# EAGLE board sang (EAGLE 6.2)
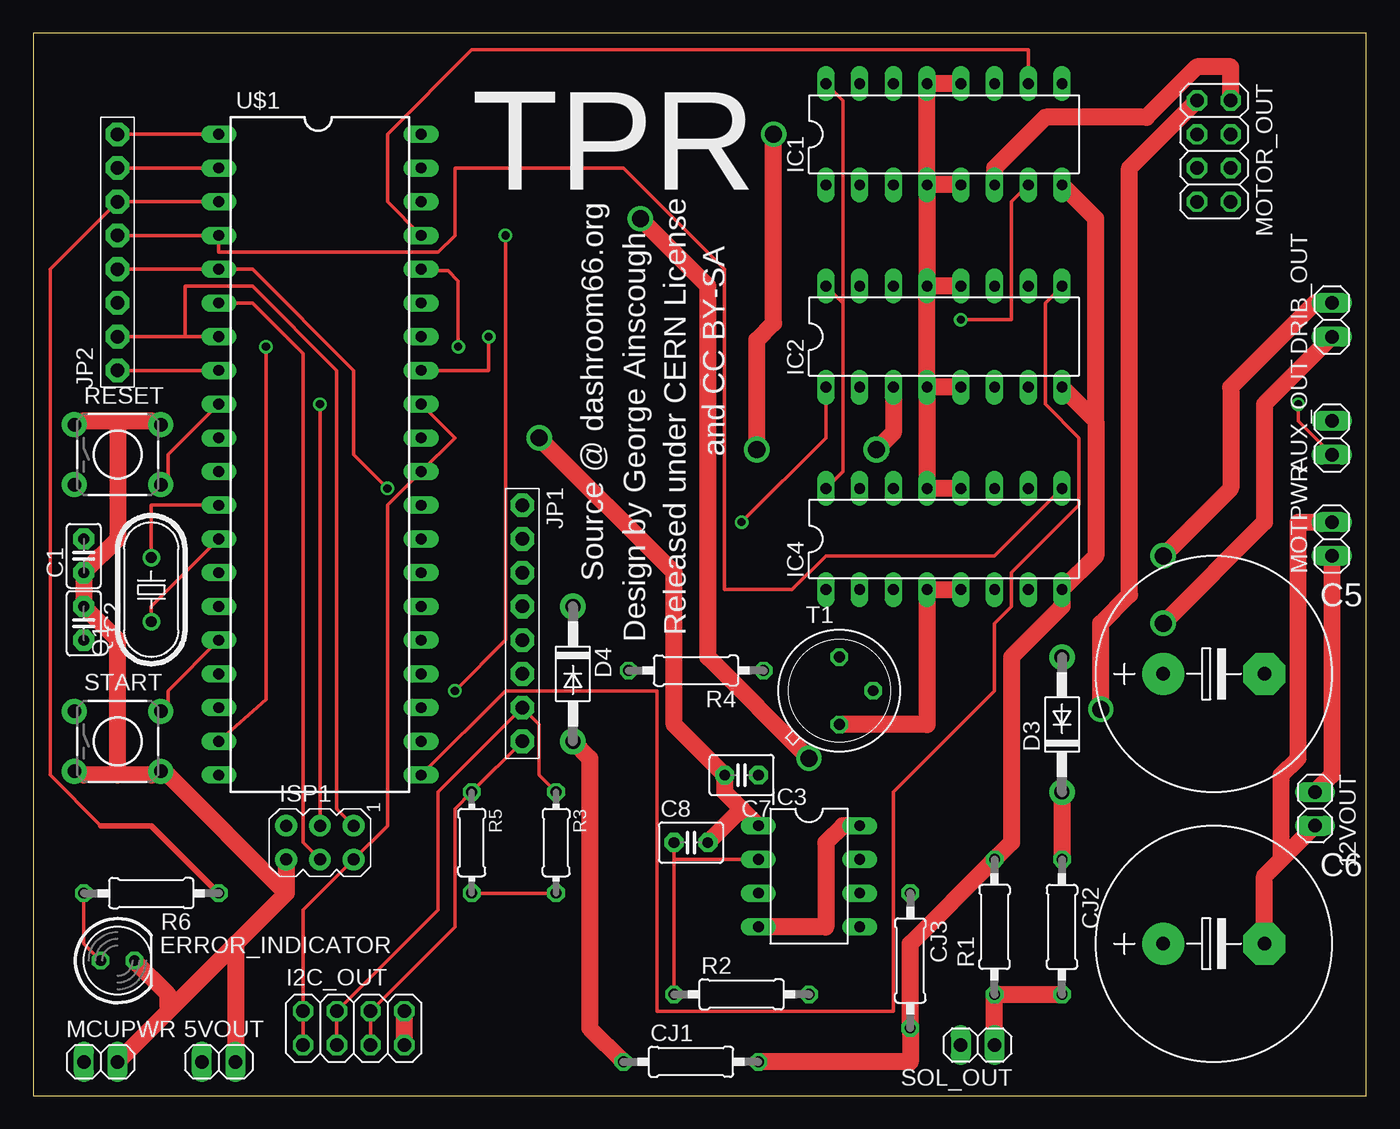
[diagram p0: board, top side]
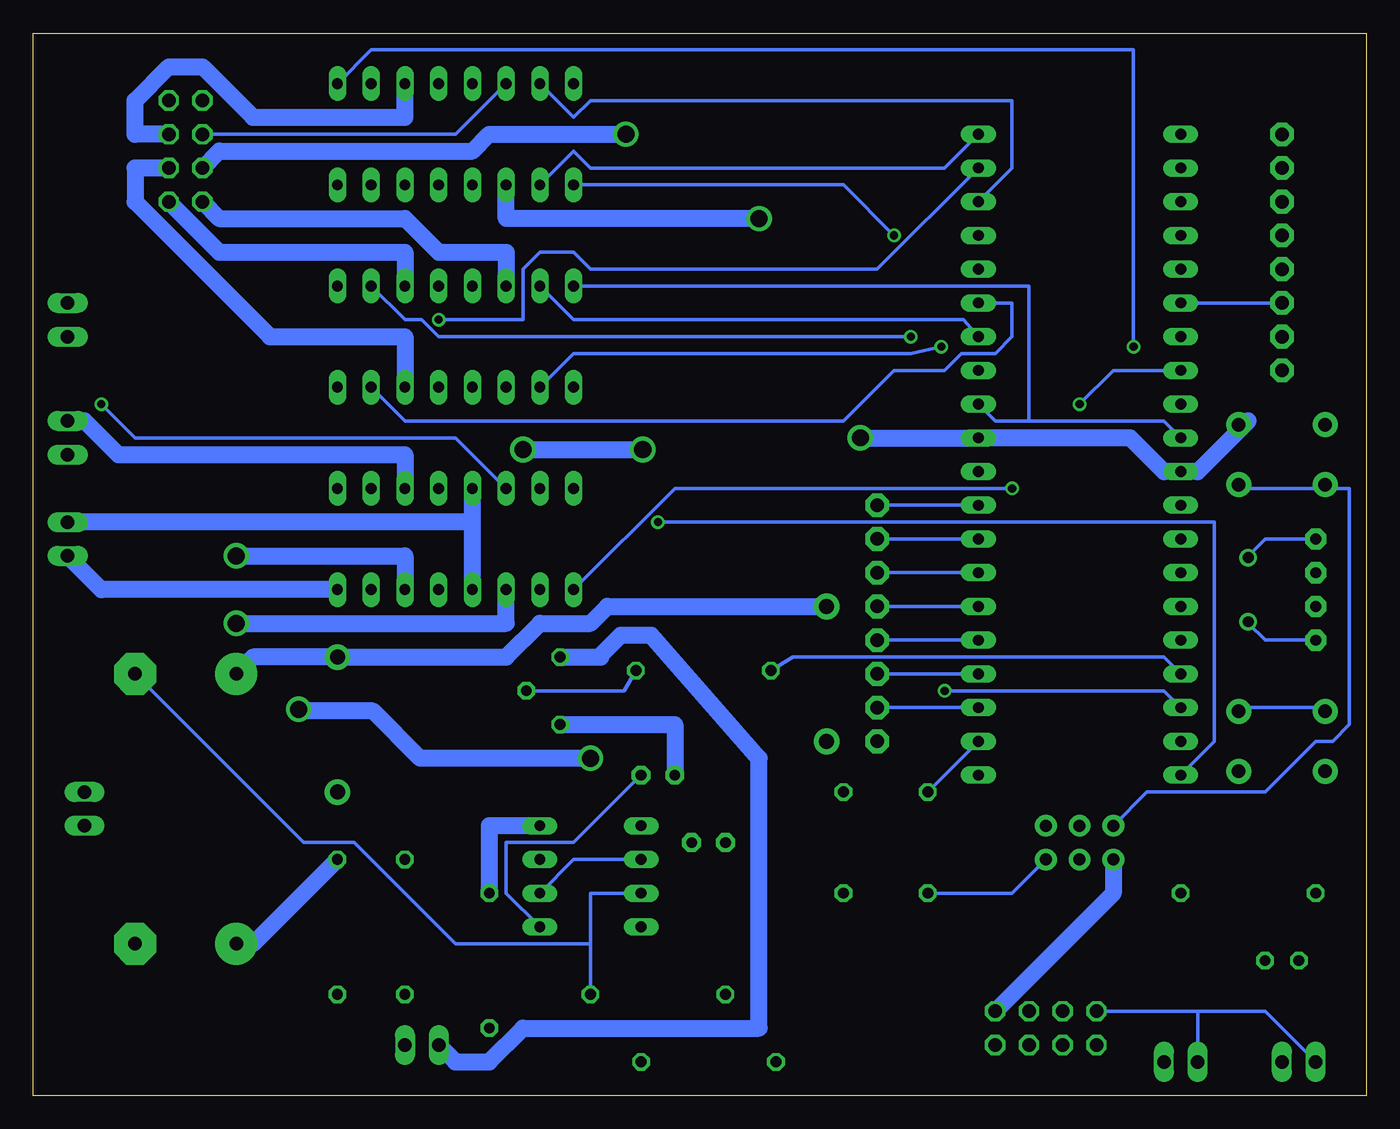
[diagram p1: board, bottom side, seen from below]

Size 100.38 x 80 mm. Coordinates in mm from the lower left corner, seen from the top.
Outline: 0,0 100.38,0 100.38,80 0,80 0,0
Copper layers (1*16): Top 0.035mm / dielectric 1.5mm / Bottom 0.035mm
Design rules: minimum track width 10mil, minimum drill 24mil, track to track 8mil, track to pad 8mil, pad to pad 8mil, via to via 8mil, smd to smd 8mil, copper to edge 40mil, drill to drill 8mil, minimum pad ring 10mil, minimum via ring 8mil, stop-mask expansion 4mil, vias tented up to drill 0mil, thermal gap 10mil
Net classes: 0 default: width 0.254 mm, drill 0.254 mm; 1 HighPow: width 1.27 mm, drill 1.27 mm; 2 LowPow: width 0.254 mm, drill 0.254 mm

## Footprints (pad centres in the part's own frame; a part is rotated, then mirrored left to right if it is on the bottom)
1X02 = drill 1.016 long: 1 -1.27,0; 2 1.27,0
C2.5-2 = drill 0.813 pad 1.6 octagon: 1 -1.27,0; 2 1.27,0
E7,5-18 = drill 1.016 pad 3.15: + -3.81,0 | drill 1.016 pad 3.15 octagon: - 3.81,0
C025-030X050 = drill 0.813 pad 1.422 octagon: 1 -1.27,0; 2 1.27,0
0207/10 = drill 0.813 octagon: 1 -5.08,0; 2 5.08,0
DO41-10 = drill 1.118 pad 1.93: A 5.08,0; C -5.08,0
LED5MM = drill 0.813 octagon: A -1.27,0; K 1.27,0
2X04 = drill 1.016 octagon: 1 -3.81,-1.27; 2 -3.81,1.27; 3 -1.27,-1.27; 4 -1.27,1.27; 5 1.27,-1.27; 6 1.27,1.27; 7 3.81,-1.27; 8 3.81,1.27
DIL16 = drill 0.813 long: 1 -8.89,-3.81; 2 -6.35,-3.81; 3 -3.81,-3.81; 4 -1.27,-3.81; 5 1.27,-3.81; 6 3.81,-3.81; 7 6.35,-3.81; 8 8.89,-3.81; 9 8.89,3.81; 10 6.35,3.81; 11 3.81,3.81; 12 1.27,3.81; 13 -1.27,3.81; 14 -3.81,3.81; 15 -6.35,3.81; 16 -8.89,3.81
DIL-08 = drill 0.813 long: 1 -3.81,-3.81; 2 -1.27,-3.81; 3 1.27,-3.81; 4 3.81,-3.81; 5 3.81,3.81; 6 1.27,3.81; 7 -1.27,3.81; 8 -3.81,3.81
AVRISP = drill 0.9 pad 1.626: 1 -1.27,2.54; 2 1.27,2.54; 3 -1.27,0; 4 1.27,0; 5 -1.27,-2.54; 6 1.27,-2.54
1X08-BIG = drill 1.016 pad 1.778 octagon: 1 -8.89,0; 2 -6.35,0; 3 -3.81,0; 4 -1.27,0; 5 1.27,0; 6 3.81,0; 7 6.35,0; 8 8.89,0
HC49U70 = drill 0.813: 1 -2.413,0; 2 2.413,0
0204/7 = drill 0.813 octagon: 1 -3.81,0; 2 3.81,0
TACTILE-PTH = drill 1.016 pad 1.88: 1 -3.251,2.261; 2 3.251,2.261; 3 -3.251,-2.261; 4 3.251,-2.261
TO39 = drill 0.813 octagon: 1 0,-2.54; 2 2.54,0; 3 0,2.54
ATMEGA644 = drill 0.813 long: 1 -22.86,-7.62; 2 -20.32,-7.62; 3 -17.78,-7.62; 4 -15.24,-7.62; 5 -12.7,-7.62; 6 -10.16,-7.62; 7 -7.62,-7.62; 8 -5.08,-7.62; 9 -2.54,-7.62; 10 0,-7.62; 11 2.54,-7.62; 12 5.08,-7.62; 13 7.62,-7.62; 14 10.16,-7.62; 15 12.7,-7.62; 16 15.24,-7.62; 17 17.78,-7.62; 18 20.32,-7.62; 19 22.86,-7.62; 20 25.4,-7.62; 21 25.4,7.62; 22 22.86,7.62; 23 20.32,7.62; 24 17.78,7.62; 25 15.24,7.62; 26 12.7,7.62; 27 10.16,7.62; 28 7.62,7.62; 29 5.08,7.62; 30 2.54,7.62; 31 0,7.62; 32 -2.54,7.62; 33 -5.08,7.62; 34 -7.62,7.62; 35 -10.16,7.62; 36 -12.7,7.62; 37 -15.24,7.62; 38 -17.78,7.62; 39 -20.32,7.62; 40 -22.86,7.62

## Placement (x,y rotation side)
5VOUT  [1X02]  13.97,2.54 0 top
12VOUT  [1X02]  96.52,21.59 270 top
AUX_OUT  [1X02]  97.79,49.53 90 top
C1  22pF  [C2.5-2]  3.81,40.64 90 top
C2  22pF  [C2.5-2]  3.81,35.56 270 top
C5  [E7,5-18]  88.9,31.75 0 top
C6  [E7,5-18]  88.9,11.43 0 top
C7  100nF  [C025-030X050]  53.34,24.13 180 top
C8  1nF  [C025-030X050]  49.53,19.05 0 top
CJ1  [0207/10]  49.53,2.54 0 top
CJ2  [0207/10]  77.47,12.7 270 top
CJ3  [0207/10]  66.04,10.16 270 top
D3  1N4004  [DO41-10]  77.47,27.94 90 top
D4  1N4004  [DO41-10]  40.64,31.75 270 top
DRIB_OUT  [1X02]  97.79,58.42 90 top
ERROR_INDICATOR  [LED5MM]  6.35,10.16 0 top
I2C_OUT  [2X04]  24.13,5.08 0 top
IC1  L293D  [DIL16]  68.58,72.39 0 top
IC2  L293D  [DIL16]  68.58,57.15 0 top
IC3  NE555  [DIL-08]  58.42,16.51 270 top
IC4  L293D  [DIL16]  68.58,41.91 0 top
ISP1  AVRISP-6  [AVRISP]  21.59,19.05 270 top
JP1  [1X08-BIG]  36.83,35.56 270 top
JP2  [1X08-BIG]  6.35,63.5 90 top
MCUPWR  [1X02]  5.08,2.54 0 top
MOTOR_OUT  [2X04]  88.9,71.12 270 top
MOTPWR  [1X02]  97.79,41.91 90 top
Q1  16MHz  [HC49U70]  8.89,38.1 90 top
R1  10K  [0207/10]  72.39,12.7 90 top
R2  33K  [0207/10]  53.34,7.62 0 top
R3  [0204/7]  39.37,19.05 270 top
R4  10K  [0207/10]  49.91,32 180 top
R5  [0204/7]  33.02,19.05 270 top
R6  220  [0207/10]  8.89,15.24 180 top
RESET  [TACTILE-PTH]  6.35,48.26 0 top
SOL_OUT  [1X02]  71.12,3.81 180 top
START  [TACTILE-PTH]  6.35,26.67 0 top
T1  [TO39]  60.71,30.48 0 top
U$1  ATMEGA644*  [ATMEGA644]  21.59,49.53 270 top

## Library data of the parts
5VOUT 12VOUT AUX_OUT DRIB_OUT I2C_OUT MCUPWR MOTOR_OUT MOTPWR SOL_OUT = pinhead
C1 C2 = capacitor-wima
C5-C8 D3 D4 ISP1 JP1 JP2 = adafruit
CJ1-CJ3 R2 = rcl
ERROR_INDICATOR = led
IC1 IC2 IC4 = st-microelectronics; MPN: L293D; OC_FARNELL: 9589619; OC_NEWARK: 56P8249
IC3 = st-microelectronics; MF: Arrow Electronics; MPN: NE555N; OC_FARNELL: 1467742; OC_NEWARK: 89K1486
Q1 = crystal; OC_FARNELL: unknown; OC_NEWARK: unknown
R1 R3-R6 = resistor
RESET START = SparkFun
T1 = transistor
U$1 = ATMega644

## Nets
+5V [LowPow]: 5VOUT.1 I2C_OUT.1 I2C_OUT.2 IC1.16 IC2.16 IC4.16 ISP1.2 MCUPWR.1 R3.2 R5.2 U$1.10 U$1.30 U$1.32
+12V [HighPow]: 12VOUT.1 CJ1.2 CJ3.2 IC1.8 IC2.8 IC4.8 MOTPWR.1 R1.2
+24V [HighPow]: CJ2.2 R1.1 SOL_OUT.1
ERROR_LED: JP2.6 R6.1 U$1.3
GND [HighPow]: 5VOUT.2 12VOUT.2 C1.1 C2.1 C6.- C7.2 C8.2 ERROR_INDICATOR.K I2C_OUT.7 I2C_OUT.8 IC1.4 IC1.5 IC1.12 IC1.13 IC2.4 IC2.5 IC2.12 IC2.13 IC3.1 IC4.4 IC4.5 IC4.12 IC4.13 ISP1.6 MCUPWR.2 MOTPWR.2 RESET.1 RESET.2 START.3 START.4 T1.1 U$1.11 U$1.31
GO: START.1 START.2 U$1.16
M1+ [HighPow]: IC1.3 MOTOR_OUT.1
M1- [HighPow]: IC1.6 MOTOR_OUT.2
M1F: IC1.2 U$1.40
M1PWM: IC1.1 U$1.18
M1R: IC1.7 U$1.39
M2+: IC1.14 MOTOR_OUT.3
M2- [HighPow]: IC1.11 MOTOR_OUT.4
M2F: IC1.15 U$1.38
M2PWM: IC1.9 U$1.19
M2R: IC1.10 U$1.37
M3+ [HighPow]: IC2.3 MOTOR_OUT.5
M3- [HighPow]: IC2.6 MOTOR_OUT.6
M3F: IC2.2 U$1.36
M3PWM: IC2.1 U$1.20
M3R: IC2.7 U$1.35
M4+ [HighPow]: IC2.14 MOTOR_OUT.7
M4- [HighPow]: IC2.11 MOTOR_OUT.8
M4F: IC2.15 U$1.34
M4PWM: IC2.9 U$1.21
M4R: IC2.10 U$1.33
M5+ [HighPow]: DRIB_OUT.1 IC4.3
M5- [HighPow]: DRIB_OUT.2 IC4.6
M5F: IC4.2
M5PWM: IC4.1 JP2.4 U$1.5
M5R: IC4.7
M6+: AUX_OUT.1 IC4.14
M6- [HighPow]: AUX_OUT.2 IC4.11
M6F: IC4.15
M6PWM: IC4.9 JP2.5 U$1.4
M6R: IC4.10
MISO [LowPow]: ISP1.1 JP2.2 U$1.7
MOSI [LowPow]: ISP1.4 JP2.3 U$1.6
N$1: C1.2 Q1.2 U$1.12
N$2: C2.2 Q1.1 U$1.13
N$3: C8.1 IC3.2 IC3.6 R2.1
N$4: R4.1 T1.2
N$5: C5.- IC3.3 R2.2
N$6 [HighPow]: C5.+ D3.A D4.C
N$7 [HighPow]: SOL_OUT.2 T1.3
N$8: JP1.6 U$1.24
N$9: C7.1 IC3.5
N$10: JP1.5 U$1.25
N$11: JP1.4 U$1.26
N$12: JP1.3 U$1.27
N$13: JP1.2 U$1.28
N$14: JP1.1 U$1.29
N$15: JP2.8 U$1.1
N$16: JP2.7 U$1.2
N$18 [HighPow]: C6.+ CJ2.1 D3.C
N$19 [HighPow]: CJ1.1 D4.A
N$20 [HighPow]: CJ3.1 IC3.4 IC3.8
N$21: ERROR_INDICATOR.A R6.2
RST [LowPow]: ISP1.5 RESET.3 RESET.4 U$1.9
SCK [LowPow]: ISP1.3 JP2.1 U$1.8
SCL: I2C_OUT.5 I2C_OUT.6 JP1.8 R5.1 U$1.22
SDA: I2C_OUT.3 I2C_OUT.4 JP1.7 R3.1 U$1.23
SOLSIG: R4.2 U$1.17

## Tracks (layer width: path | path; a pad name or v marks a point on that pad's centre or on a via)
+5V
  Top 0.254: R3.2 R5.2 | I2C_OUT.1 I2C_OUT.2 20.32,13.97 ISP1.2 26.67,20.32 26.67,44.45 U$1.30 31.75,49.53 U$1.32 | IC4.16 60.96,46.99 60.96,59.69 | IC2.16 60.96,59.69 | IC1.16 60.96,74.93 60.96,59.69
  Bottom 0.254: ISP1.2 26.67,15.24 R5.2 | MCUPWR.1 7.62,6.35 12.7,6.35 | I2C_OUT.2 12.7,6.35 | 12.7,6.35 5VOUT.1 | U$1.10 15.24,50.8 25.4,50.8 | 25.4,50.8 27.94,50.8 U$1.32 | 25.4,50.8 25.4,60.96 IC2.16
+12V
  Top 1.27: CJ1.2 66.04,2.54 CJ3.2 66.04,11.43 R1.2 73.66,19.05 73.66,33.02 77.47,36.83 IC4.8 80.01,40.64 80.01,50.8 | 12VOUT.1 97.79,24.13 MOTPWR.1 | IC2.8 80.01,50.8 | IC1.8 80.01,66.04 80.01,50.8
  Bottom 1.27: MOTPWR.1 95.25,38.1 IC4.8
+24V
  Top 1.27: SOL_OUT.1 R1.1 CJ2.2
ERROR_LED
  Top 0.254: U$1.3 JP2.6 1.27,62.23 1.27,24.13 5.08,20.32
  Top 0.406: 5.08,20.32 8.89,20.32 R6.1
GND  (via drill 1.27)
  Top 1.27: 6.35,50.8 8.89,50.8 RESET.2 | 6.35,50.8 3.81,50.8 RESET.1 | 6.35,50.8 6.35,41.91 C1.1 C2.1 6.35,34.29 6.35,24.13 | 6.35,24.13 8.89,24.13 START.4 10.16,24.13 19.05,15.24 | 6.35,24.13 3.81,24.13 START.3 | I2C_OUT.8 I2C_OUT.7 | 19.05,15.24 15.24,11.43 | 15.24,11.43 10.16,6.35 | 10.16,6.35 MCUPWR.2 | ISP1.6 19.05,15.24 | 15.24,11.43 5VOUT.2 | 93.98,17.78 92.71,16.51 C6.- | 93.98,17.78 12VOUT.2 | MOTPWR.2 95.25,43.18 95.25,25.4 93.98,24.13 93.98,17.78 | IC1.12 IC1.13 IC1.4 | IC2.12 IC2.13 | IC1.5 IC1.4 | IC1.4 IC2.13 | IC4.12 IC4.13 IC2.4 | IC2.5 IC2.4 | 53.34,21.59 52.07,22.86 C7.2 48.26,27.94 48.26,39.37 v38.1,49.53 | 53.34,21.59 IC3.1 | 53.34,21.59 C8.2 | T1.1 67.31,27.94 IC4.4 IC4.5 | IC2.4 IC2.13 | ERROR_INDICATOR.K 10.16,7.62 10.16,6.35
  Bottom 1.27: RESET.2 8.89,50.8 12.7,46.99 U$1.11 15.24,46.99 17.78,49.53 U$1.31 v38.1,49.53 | I2C_OUT.8 19.05,15.24 ISP1.6 | C7.2 52.07,27.94 T1.1 | IC4.4 67.31,43.18 | 67.31,43.18 IC4.13 | 67.31,43.18 MOTPWR.2
GO
  Top 0.254: U$1.16 10.16,30.48 10.16,29.21 START.2
  Bottom 0.254: START.1 3.81,29.21 8.89,29.21 START.2
M1+  (via drill 1.27)
  Top 1.27: v45.72,66.04 50.8,60.96 50.8,33.02 v58.42,25.4 | MOTOR_OUT.1 82.55,69.85 82.55,37.72 80.39,35.56 v80.39,29.08
  Bottom 1.27: IC1.3 64.77,66.04 v45.72,66.04 | v58.42,25.4 71.25,25.4 74.8,28.96 80.26,28.96 v80.39,29.08
M1-
  Top 1.27: IC1.6 72.39,69.85 76.2,73.66 83.82,73.66 87.63,77.47 90.17,77.47 MOTOR_OUT.2
M1F
  Bottom 0.254: U$1.40 31.75,69.85 58.42,69.85 59.69,71.12 IC1.2
M1PWM  (via drill 0.61)
  Top 0.254: v31.75,30.48 35.56,34.29 v35.56,64.77
  Bottom 0.254: U$1.18 15.24,30.48 v31.75,30.48 | v35.56,64.77 39.37,68.58 IC1.1
M1R  (via drill 0.61)
  Top 0.254: v69.85,58.42 73.66,58.42 73.66,67.31 IC1.7
  Bottom 0.254: U$1.39 36.83,62.23 58.42,62.23 59.69,63.5 62.23,63.5 63.5,62.23 63.5,58.42 v69.85,58.42
M2+
  Bottom 0.254: IC1.14 68.58,72.39 MOTOR_OUT.3
M2-
  Bottom 1.27: IC1.11 72.39,73.66 83.82,73.66 87.63,77.47 90.17,77.47 92.71,74.93 92.71,72.39 MOTOR_OUT.4
M2F
  Bottom 0.254: U$1.38 26.67,69.85 26.67,74.93 58.42,74.93 59.69,73.66 IC1.15
M2PWM  (via drill 0.61)
  Top 0.254: U$1.19 17.53,29.84 v17.53,56.39
  Bottom 0.254: v17.53,56.39 17.53,78.74 74.93,78.74 IC1.9
M2R
  Top 0.254: U$1.37 26.67,67.31 26.67,72.39 33.02,78.74 74.93,78.74 IC1.10
M3+  (via drill 1.27, 1.3)
  Top 1.27: v55.75,72.39 55.75,58.17 54.48,56.9 v54.48,48.64 | IC2.3 64.77,49.91 v63.5,48.64
  Bottom 1.27: v55.75,72.39 66.04,72.39 67.31,71.12 86.36,71.12 MOTOR_OUT.5 | v63.5,48.64 v54.48,48.64
M3-
  Bottom 1.27: IC2.6 72.39,57.15 82.55,57.15 92.71,67.31 92.71,69.85 MOTOR_OUT.6
M3F  (via drill 0.61)
  Top 0.254: v32,56.39 32,61.34 31.24,62.1 29.34,62.1 U$1.36
  Bottom 0.254: v32,56.39 34.29,55.88 59.69,55.88 IC2.2
M3PWM  (via drill 0.61)
  Top 0.254: v53.34,43.18 59.69,49.53 IC2.1
  Bottom 0.254: U$1.20 11.43,26.67 11.43,43.18 v53.34,43.18
M3R
  Bottom 0.254: IC2.7 72.39,50.8 39.37,50.8 35.56,54.61 31.75,54.61 30.48,55.88 27.94,55.88 26.67,57.15 26.67,59.69 U$1.35
M4+
  Bottom 1.27: IC2.14 64.77,63.5 69.85,63.5 72.39,66.04 86.36,66.04 MOTOR_OUT.7
M4-
  Bottom 1.27: IC2.11 72.39,63.5 86.36,63.5 MOTOR_OUT.8
M4F
  Bottom 0.254: U$1.34 30.35,58.42 59.69,58.42 IC2.15
M4PWM
  Top 0.254: U$1.21 35.56,30.48 46.99,30.48 46.99,6.35 64.77,6.35 64.77,22.86 72.39,30.48 72.39,35.56 73.66,36.83 73.66,39.37 78.74,44.45 78.74,49.53 76.2,52.07 76.2,59.69 IC2.9
M4R  (via drill 0.61)
  Top 0.254: U$1.33 34.29,54.61 v34.29,57.15
  Bottom 0.254: v34.29,57.15 69.85,57.15 71.12,58.42 72.39,58.42 IC2.10
M5+  (via drill 1.27)
  Top 1.27: v85.09,35.56 92.71,43.18 92.71,52.07 DRIB_OUT.1
  Bottom 1.27: IC4.3 64.77,35.56 v85.09,35.56
M5-  (via drill 1.27)
  Top 1.27: v85.09,40.64 90.17,45.72 90.17,53.34 96.52,59.69 DRIB_OUT.2
  Bottom 1.27: IC4.6 72.39,40.64 v85.09,40.64
M5PWM  (via drill 0.61)
  Top 0.254: JP2.4 U$1.5 16.51,62.23 24.13,54.61 24.13,48.26 v26.67,45.72
  Bottom 0.254: IC4.1 52.07,45.72 v26.67,45.72
M6+  (via drill 0.61)
  Top 0.254: v95.25,52.07 95.25,50.8 AUX_OUT.1
  Bottom 0.254: IC4.14 68.58,49.53 92.71,49.53 v95.25,52.07
M6-
  Bottom 1.27: IC4.11 72.39,48.26 93.98,48.26 96.52,50.8 AUX_OUT.2
M6PWM
  Top 0.254: JP2.5 U$1.4 13.97,63.5 30.48,63.5 31.75,64.77 31.75,69.85 44.45,69.85 52.07,62.23 52.07,38.1 57.15,38.1 59.69,40.64 72.39,40.64 IC4.9
MISO
  Top 0.254: JP2.2 11.43,57.15 | 11.43,57.15 U$1.7 | ISP1.1 22.86,21.59 22.86,54.61 16.51,60.96 11.43,60.96 11.43,57.15
MOSI
  Top 0.254: ISP1.4 20.32,19.05 20.32,55.88 16.51,59.69 U$1.6
  Bottom 0.254: JP2.3 U$1.6
N$1
  Top 0.254: U$1.12 8.89,44.45 Q1.2
  Bottom 0.254: C1.2 7.62,41.91 8.89,40.64 Q1.2
N$2
  Top 0.254: U$1.13 8.89,36.83 Q1.1 8.89,35.56
  Bottom 0.254: C2.2 7.62,34.29 8.89,35.56 Q1.1
N$3
  Top 0.254: C8.1 48.26,17.78 | 48.26,17.78 R2.1 | 48.26,17.78 IC3.2
  Bottom 0.254: IC3.6 59.69,17.78 IC3.2
N$4
  Bottom 0.254: R4.1 55.88,30.48 T1.2
N$5
  Bottom 0.254: 58.42,11.43 58.42,15.24 IC3.3 | 58.42,11.43 R2.2 | C5.- 80.01,19.05 76.2,19.05 68.58,11.43 58.42,11.43
N$6
  Bottom 1.27: D4.C 57.15,36.83 58.42,35.56 62.23,35.56 64.77,33.02 D3.A 83.82,33.02 C5.+
N$7
  Bottom 1.27: SOL_OUT.2 68.58,2.54 66.04,2.54 63.5,5.08 45.72,5.08 45.72,25.4 53.85,34.67 56.13,34.67 57.66,33.15 57.66,33.02 T1.3
N$8
  Bottom 0.254: JP1.6 U$1.24
N$9
  Bottom 0.254: IC3.5 64.77,15.24 64.77,19.05 59.69,19.05 C7.1
N$10
  Bottom 0.254: JP1.5 U$1.25
N$11
  Bottom 0.254: JP1.4 U$1.26
N$12
  Bottom 0.254: JP1.3 U$1.27
N$13
  Bottom 0.254: JP1.2 U$1.28
N$14
  Bottom 0.254: JP1.1 U$1.29
N$15
  Top 0.254: JP2.8 U$1.1
N$16
  Top 0.254: JP2.7 U$1.2
N$18
  Top 1.27: D3.C CJ2.1
  Bottom 1.27: CJ2.1 83.82,11.43 C6.+
N$19
  Top 1.27: CJ1.1 41.91,5.08 41.91,25.4 D4.A
N$20
  Top 1.27: IC3.4 59.69,12.7 59.69,19.05 60.96,20.32 IC3.8
  Bottom 1.27: CJ3.1 66.04,20.32 IC3.8
N$21
  Top 0.254: ERROR_INDICATOR.A 3.81,11.43 R6.2
RST
  Top 0.254: U$1.9 10.16,48.26 10.16,45.72 RESET.4
  Bottom 0.254: ISP1.5 16.51,22.86 7.62,22.86 3.81,26.67 2.54,26.67 1.27,27.94 1.27,45.72 2.54,45.72 RESET.3 3.81,45.72 8.89,45.72 RESET.4
SCK  (via drill 0.61)
  Top 0.254: JP2.1 U$1.8 | v21.59,52.07 ISP1.3
  Bottom 0.254: v21.59,52.07 19.05,54.61 U$1.8
SCL
  Top 0.254: I2C_OUT.5 I2C_OUT.6 31.75,12.7 31.75,21.59 R5.1 JP1.8
  Bottom 0.254: R5.1 U$1.22
SDA
  Top 0.254: I2C_OUT.3 I2C_OUT.4 30.48,13.97 30.48,22.86 JP1.7 38.1,27.94 38.1,24.13 R3.1
  Bottom 0.254: JP1.7 U$1.23
SOLSIG
  Bottom 0.254: U$1.17 15.24,33.02 43.18,33.02 R4.2

## Text on the board
tPlace: TPR | and CC BY-SA | Source @ dashroom66.org | Released under CERN License | Design by George Ainscough